# EAGLE board h.z (EAGLE 7.5.0)
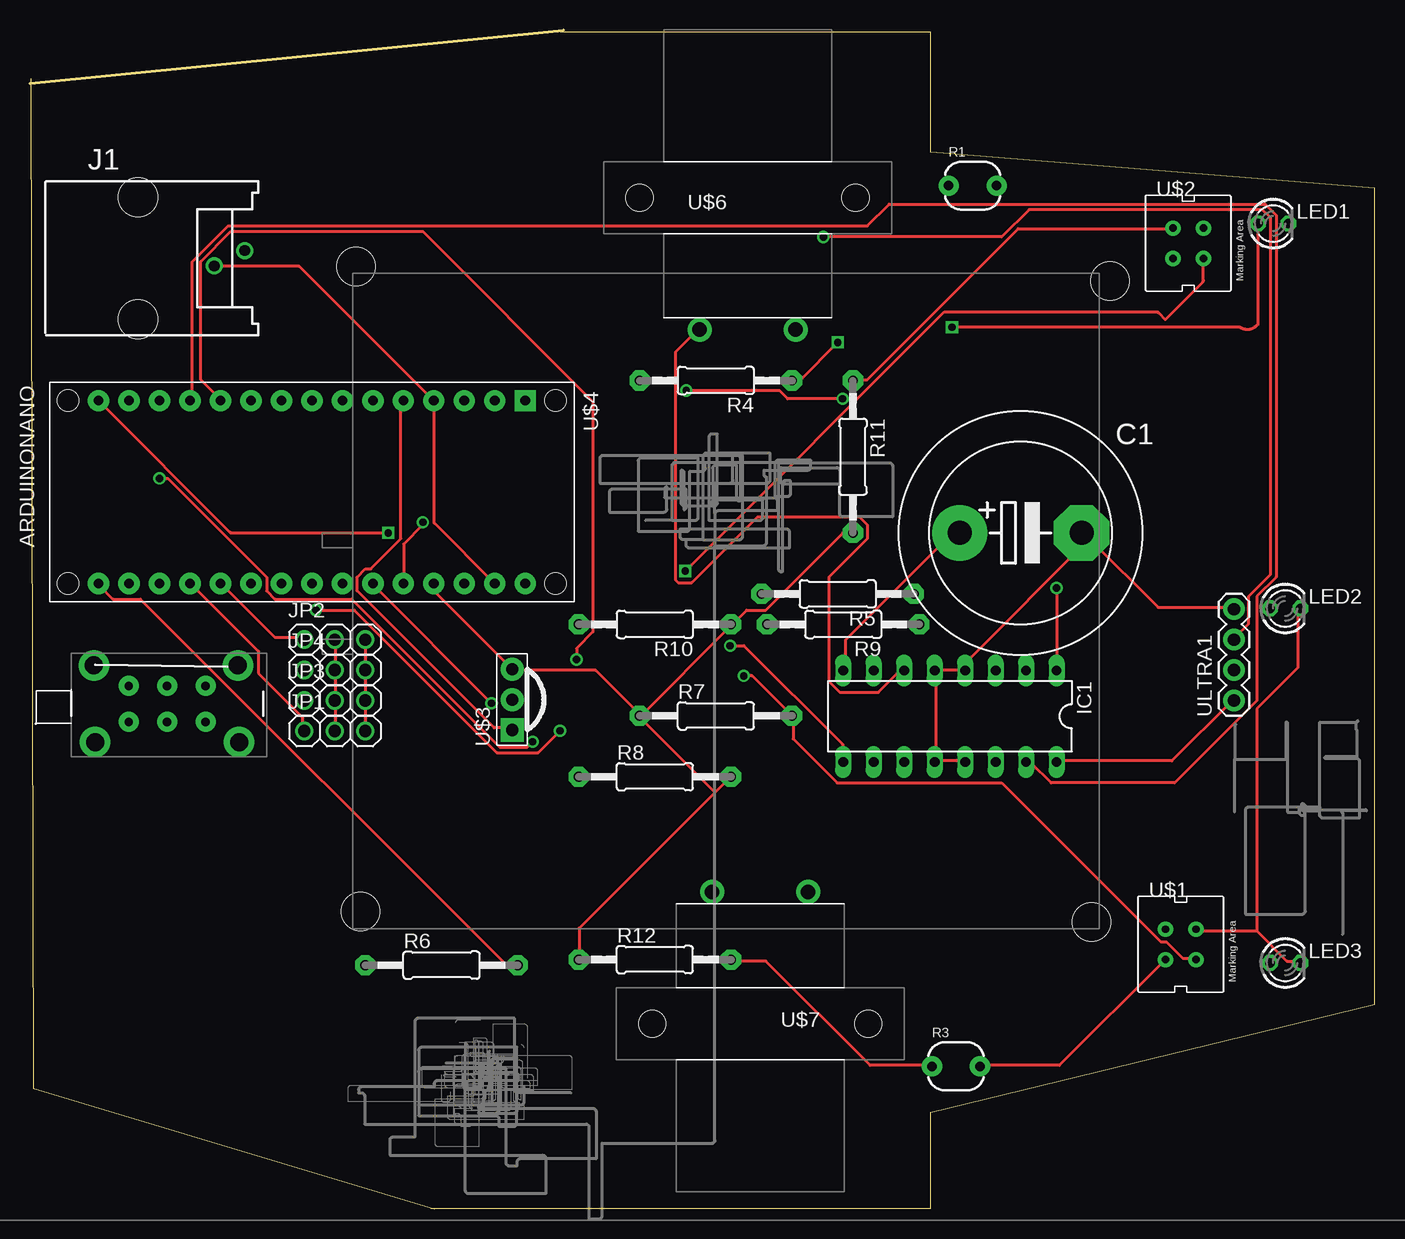
[diagram p0: board, top side]
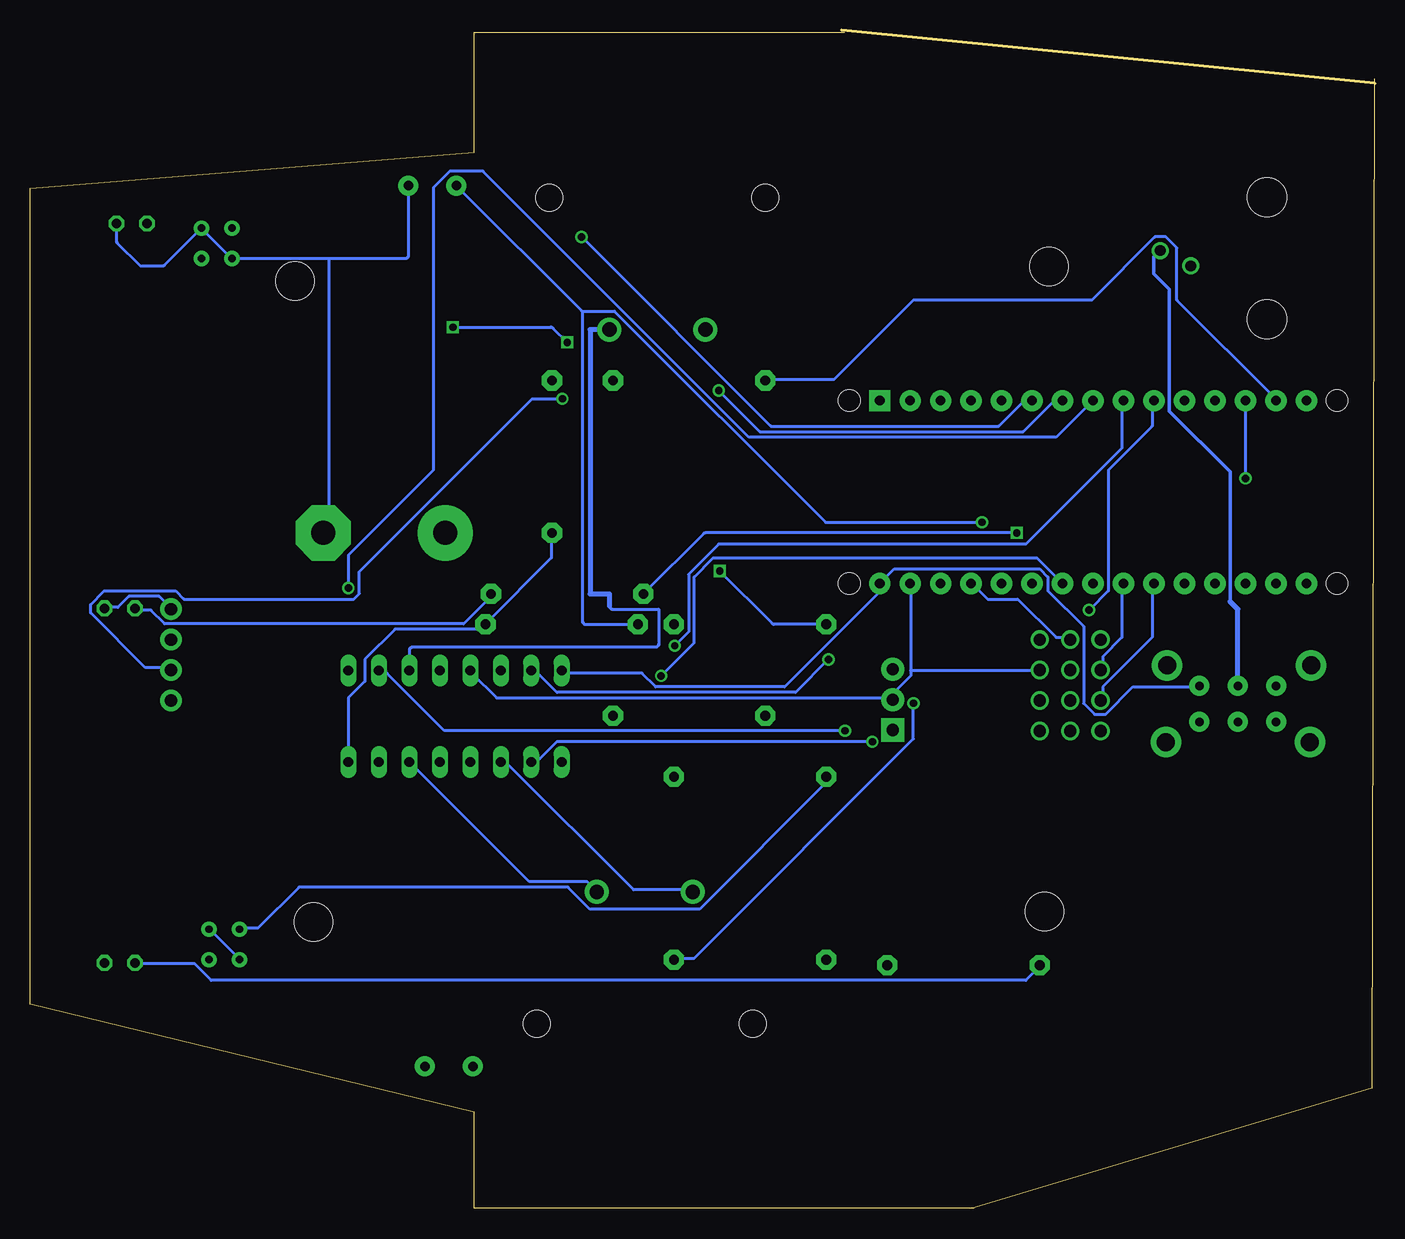
[diagram p1: board, bottom side, seen from below]

Size 112.08 x 98.24 mm. Coordinates in mm from the lower left corner, seen from the top.
Outline: 0.08,94.18 0.28,10.07 33.68,0
Outline: 33.38,0.07 75.08,0.07 75.08,8.07 112.08,17.07 112.08,85.07 75.08,88.07 75.08,98.07 44.17,98.07
Outline: 0,93.79 44.45,98.24
Copper layers (1*16): Top 0.035mm / dielectric 1.5mm / Bottom 0.035mm
Design rules "default": minimum track width 10mil, minimum drill 24mil, track to track 8mil, track to pad 8mil, pad to pad 8mil, via to via 8mil, smd to smd 8mil, copper to edge 40mil, drill to drill 8mil, minimum pad ring 10mil, minimum via ring 8mil, stop-mask expansion 4mil, vias tented up to drill 0mil, thermal gap 10mil
Holes 3.2 mm at 27.54,24.77 27.16,78.53 90,77.31 88.46,23.91

## Footprints (pad centres in the part's own frame; a part is rotated, then mirrored left to right if it is on the bottom)
EB20D = drill 2.007 pad 4.597: + -5.08,0 | drill 2.007 pad 4.597 octagon: - 5.08,0
DIL16 = drill 0.813 long: 1 -8.89,-3.81; 2 -6.35,-3.81; 3 -3.81,-3.81; 4 -1.27,-3.81; 5 1.27,-3.81; 6 3.81,-3.81; 7 6.35,-3.81; 8 8.89,-3.81; 9 8.89,3.81; 10 6.35,3.81; 11 3.81,3.81; 12 1.27,3.81; 13 -1.27,3.81; 14 -3.81,3.81; 15 -6.35,3.81; 16 -8.89,3.81
215876-7 = drill 0.889: 1 -0.635,8.89; 2 0.635,6.35 | hole 3.251: -5.08,0; 5.08,0
1X03 = drill 1.016: 1 -2.54,0; 2 0,0; 3 2.54,0
LED3MM = drill 0.813 octagon: A -1.27,0; K 1.27,0
PHOTOCELL = drill 0.8 pad 1.676: 1 -2,0; 2 2,0
0207/12 = drill 0.813 pad 1.676 octagon: 1 -6.35,0; 2 6.35,0
SWITCHE-DPDT = drill 0.7 pad 1.676: 1 -3.2,1.5; 2 0,1.5; 3 3.2,1.5; 4 -3.2,-1.5; 5 0,-1.5; 6 3.2,-1.5 | drill 1.5 pad 2.54: P$1 -6.1,3.2; P$2 -6,-3.2; P$3 6,-3.2; P$4 5.9,3.2
4 = drill 0.61 pad 1.27: A -1.27,1.27; C 1.27,-1.27; E 1.27,1.27; K -1.27,-1.27
PNA460XM = drill 1.016 pad 1.93 square: 1 -2.54,0 | drill 1.016 pad 1.93: 2 0,0; 3 2.54,0
PDIP-32 = drill 0.8 pad 1.778: 3V3 15.24,-35.56; +5V 15.24,-10.16; A0 15.24,-12.7; A1 15.24,-15.24; A2 15.24,-17.78; A3 15.24,-20.32; A4 15.24,-22.86; A5 15.24,-25.4; A6 15.24,-27.94; A7 15.24,-30.48; AREF 15.24,-33.02; D0/RX 0,-5.08; D2 0,-12.7; D3 0,-15.24; D4 0,-17.78; D5 0,-20.32; D6 0,-22.86; D7 0,-25.4; D8 0,-27.94; D9 0,-30.48; D10 0,-33.02; D11 0,-35.56; D12 0,-38.1; D13 15.24,-38.1; GND 0,-10.16; GND1 15.24,-5.08; RESET 0,-7.62; RESET1 15.24,-7.62; VIN 15.24,-2.54 | drill 0.8 pad 1.778 square: D1/TX 0,-2.54 | hole 1.778: 0,0; 0,-40.64; 15.24,-40.64; 15.24,0
VIBE-MOTOR-10MM = drill 1.2 pad 2: + 13,-11; - 5,-11 | hole 2.25: 0,0; 18,0
1X04-BIG = drill 1.016 pad 1.778: 1 0,0; 2 2.54,0; 3 5.08,0; 4 7.62,0

## Placement (x,y rotation side)
C1  [EB20D]  82.55,56.33 0 top
IC1  L293D  [DIL16]  76.66,41.05 180 top
J1  [215876-7]  9,79.22 270 top
JP1  [1X03]  25.4,39.82 0 top
JP2  [1X03]  25.4,47.44 0 top
JP3  [1X03]  25.4,42.36 0 top
JP4  [1X03]  25.4,44.9 0 top
LED1  TLLG4400  [LED3MM]  103.6,82.12 0 top
LED2  TLLR4400  [LED3MM]  104.6,50.04 0 top
LED3  TLLY4400  [LED3MM]  104.6,20.5 0 top
R1  PHOTOCELLPTH  [PHOTOCELL]  78.55,85.27 0 top
R3  PHOTOCELLPTH  [PHOTOCELL]  77.17,11.88 0 top
R4  1k  [0207/12]  57.15,69.03 180 top
R5  1k  [0207/12]  67.31,51.25 180 top
R6  1k  [0207/12]  34.29,20.31 0 top
R7  1k  [0207/12]  57.15,41.09 0 top
R8  100  [0207/12]  52.07,36.01 0 top
R9  10k  [0207/12]  67.77,48.71 180 top
R10  1k  [0207/12]  52.07,48.71 180 top
R11  100  [0207/12]  68.58,62.68 270 top
R12  10k  [0207/12]  52.07,20.77 0 top
S1  [SWITCHE-DPDT]  11.43,42.09 0 top
U$1  CNY70  [4]  95.9,22.04 0 top
U$2  CNY70  [4]  96.52,80.46 0 top
U$3  PNA460XM  [PNA460XM]  40.18,42.44 90 top
U$4  ARDUINONANO  [PDIP-32]  43.81,67.35 270 top
U$5  LIPO-OUTLINE2000  [LIPO-2000]  26.88,23.34 0 top
U$6  MOTOR10MM  [VIBE-MOTOR-10MM]  50.8,84.27 0 top
U$7  MOTOR10MM  [VIBE-MOTOR-10MM]  69.85,15.42 180 top
ULTRA1  1X4-BIG  [1X04-BIG]  100.33,42.36 90 top

## Library data of the parts
C1 JP1-JP4 R4-R12 U$3 ULTRA1 = adafruit
IC1 = st-microelectronics; MPN: L293D; OC_FARNELL: 9589619; OC_NEWARK: 56P8249
J1 = con-amp
LED1 = led; MF: VISHAY SEMICONDUCTOR; OC_FARNELL: 1612435
LED2 = led; MF: VISHAY SEMICONDUCTOR; OC_FARNELL: 1612437
LED3 = led; MF: VISHAY SEMICONDUCTOR; OC_FARNELL: 1612439
R1 R3 = SparkFun-Sensors
S1 U$5-U$7 = SparkFun-Electromechanical
U$1 U$2 = cny70
U$4 = jet-lib

## Nets
GND: C1.- IC1.4 IC1.5 IC1.12 IC1.13 J1.2 JP1.3 JP2.3 JP3.3 JP4.3 LED1.K LED2.K LED3.K R1.2 R3.2 U$1.E U$1.K U$2.E U$2.K U$3.2 U$4.GND U$4.GND1 ULTRA1.4
N$1: LED1.A R4.1
N$2: LED2.A R5.1
N$3: LED3.A R6.1
N$4: IC1.2 U$4.D7
N$5: IC1.7 U$4.D8
N$6: IC1.15 U$4.D9
N$7: IC1.10 U$4.D10
N$8: IC1.1 U$4.D5
N$9: IC1.9 U$4.D6
N$10: IC1.3 U$6.+
N$11: IC1.6 U$6.-
N$12: IC1.14 U$7.-
N$13: IC1.11 U$7.+
N$14: R4.2 U$4.D11
N$15: R5.2 U$4.D12
N$16: R6.2 U$4.D13
N$17: U$4.A3
N$18: R7.2 U$1.C U$4.A2
N$19: R11.1 U$2.A
N$20: U$3.1 U$4.D2
N$21: J1.1 S1.2
N$22: R8.1 U$1.A
N$23: JP1.1 U$4.A7
N$24: R1.1 R9.2 U$4.A0
N$25: R3.1 R12.2 U$4.A1
N$26: R10.2 U$2.C
N$27: U$4.D4 ULTRA1.2
N$28: U$4.D3 ULTRA1.3
N$29: JP2.1 U$4.A6
N$30: JP3.1 U$4.A5
N$31: JP4.1 U$4.A4
V+: C1.+ IC1.8 S1.3 U$4.VIN
VCC: IC1.16 JP1.2 JP2.2 JP3.2 JP4.2 R7.1 R8.2 R9.1 R10.1 R11.2 R12.1 U$3.3 U$4.+5V ULTRA1.1

## Tracks (layer width: path | path; a pad name or v marks a point on that pad's centre or on a via)
GND
  Top 0.254: J1.2 22.31,78.58 arc-45 22.49,78.51 U$4.GND 33.65,57.29 arc45 33.72,57.12 U$4.GND1 | 102.23,23.16 104.75,20.64 105.66,20.64 LED3.K | 102.23,23.16 97.21,23.16 U$1.E | R3.2 79.38,11.96 85.78,11.96 94.46,20.64 U$1.K | JP1.3 JP3.3 JP4.3 JP2.3 | 75.49,37.33 77.77,37.33 IC1.13 | 75.49,37.33 75.49,44.65 IC1.5 75.49,44.87 77.77,44.87 IC1.4 78,44.87 78,45.56 88.29,55.85 | 75.49,37.33 IC1.12 | 88.29,55.85 87.83,56.3 C1.- 88.29,55.85 | 88.29,55.85 94,50.13 100.18,50.13 ULTRA1.4 | 102.23,23.16 102.23,41.67 105.66,45.1 105.66,49.9 LED2.K
  Bottom 0.254: R1.2 80.55,79.44 arc90 80.8,79.19 87.15,79.19 | 87.15,79.19 U$2.K U$2.E 100.89,78.63 arc45 101.07,78.55 102.87,78.55 104.8,80.48 arc45 104.87,80.66 LED1.K | U$1.K 94.69,20.87 96.98,23.16 U$1.E | 38.68,44.87 38.68,51.96 U$4.GND1 | 38.68,44.87 38.68,44.42 40.06,43.05 40.06,42.59 U$3.2 40.28,42.59 73.2,42.59 75.26,44.65 IC1.5 | 38.68,44.87 27.94,44.87 JP4.3 | LED2.K 105.66,50.13 104.75,50.13 103.83,51.05 101.32,51.05 100.41,50.13 ULTRA1.4 | 87.15,79.19 87.15,56.99 87.61,56.53 C1.-
N$1  (via drill 0.6)
  Top 0.254: LED1.A 102.33,73.73 arc-90 100.81,73.47 v76.83,73.47 | v67.31,72.2 64.14,69.03 R4.1
  Bottom 0.254: v76.83,73.47 68.69,73.47 arc45 68.51,73.4 v67.31,72.2
N$2
  Bottom 0.254: LED2.A 103.15,49.9 102.01,49.9 100.86,48.76 75.95,48.76 73.66,51.05 R5.1
N$3
  Bottom 0.254: LED3.A 103.15,20.41 98.35,20.41 96.98,19.04 29.08,19.04 27.94,20.19 R6.1
N$4  (via drill 0.61)
  Top 0.254: v44.17,39.84 42.34,38.02 38.91,38.02 27.03,49.9 v23.83,49.9
  Bottom 0.254: v44.17,39.84 77.55,39.84 82.35,44.65 82.8,44.65 IC1.2 | v23.83,49.9 22.23,51.5 22.23,61.56 18.57,65.22 18.57,67.28 U$4.D7
N$5  (via drill 0.61)
  Top 0.254: v45.54,45.79 45.54,46.7 46.91,48.07 46.91,67.28 32.74,81.45 16.74,81.45 14.22,78.94 14.22,69.11 15.82,67.51 U$4.D8
  Bottom 0.254: v45.54,45.79 48.28,43.05 68.17,43.05 69.77,44.65 70.23,44.65 IC1.7
N$6
  Top 0.254: IC1.15 83.03,37.1 83.49,37.1 85.09,35.5 95.38,35.5 102.23,42.36 102.23,51.05 103.83,52.65 103.83,82.82 102.92,83.74 71.6,83.74 69.77,81.91 16.51,81.91 13.54,78.94 13.54,67.51 U$4.D9
N$7  (via drill 0.61)
  Top 0.254: v41.88,38.93 41.43,38.47 39.14,38.47 26.8,50.82 20.4,50.82 19.71,51.5 19.71,52.65 11.48,60.88 v10.79,60.88
  Bottom 0.254: v41.88,38.93 68.17,38.93 69.77,37.33 70.23,37.33 IC1.10 | v10.79,60.88 10.79,67.28 U$4.D10
N$8  (via drill 0.61)
  Top 0.254: v85.55,51.73 85.55,44.87 IC1.1
  Bottom 0.254: v85.55,51.73 85.55,54.48 78.46,61.56 78.46,85.11 77.09,86.48 74.35,86.48 52.17,64.31 26.57,64.31 23.6,67.28 U$4.D5
N$9  (via drill 0.61)
  Top 0.254: v58.34,46.93 59.49,46.93 67.72,38.7 67.72,37.33 IC1.9
  Bottom 0.254: v58.34,46.93 57.2,48.07 57.2,52.88 54.69,55.39 29.08,55.39 21.08,63.39 21.08,67.28 U$4.D6
N$10
  Bottom 0.254: 63.8,50.23 arc-90 63.55,49.98 59.69,49.98 59.69,47.06 arc90 59.94,46.8 80.22,46.8 arc-90 80.47,46.55 IC1.3
  Bottom 0.406: U$6.+ 65.41,73.27 65.41,51.25 63.8,51.25 63.8,50.23
N$11
  Top 0.254: IC1.6 72.75,44.65 72.29,44.65 70.69,43.05 67.49,43.05 66.57,43.96 66.57,52.65 69.77,55.85 69.77,56.99 69.09,57.68 60.63,57.68 55.14,52.19 54,52.19 53.77,52.42 53.77,71.39 55.6,73.22 U$6.-
N$12
  Bottom 0.254: IC1.14 80.29,37.1 70.46,27.27 65.66,27.27 64.97,26.59 U$7.-
N$13
  Bottom 0.254: IC1.11 72.75,37.1 72.29,37.1 61.77,26.59 56.97,26.59 U$7.+
N$14
  Bottom 0.254: R4.2 50.8,69.11 45.09,69.11 38.46,75.74 23.6,75.74 18.34,80.99 17.42,80.99 16.51,80.08 16.51,75.74 8.28,67.51 U$4.D11
N$15  (via drill 0.6)
  Top 0.254: U$4.D12 16.66,56.4 arc45 16.84,56.33 v29.84,56.33
  Bottom 0.254: v29.84,56.33 55.77,56.33 arc-45 55.95,56.26 R5.2
N$16
  Top 0.254: R6.2 40.51,20.41 39.6,20.41 9.2,50.82 6.91,50.82 5.77,51.96 U$4.D13
N$18  (via drill 0.61)
  Top 0.254: U$1.C 96.98,20.87 96.06,20.87 94.69,22.24 94.23,22.24 80.97,35.5 67.26,35.5 63.6,39.16 63.6,40.99 R7.2 60.17,44.42 v59.49,44.42
  Bottom 0.254: v59.49,44.42 56.74,47.16 56.74,52.65 55.14,54.25 28.17,54.25 26.11,52.19 U$4.A2
N$19
  Top 0.254: U$2.A 95.15,81.68 82.35,81.68 69.77,69.11 68.63,69.11 R11.1
N$20
  Top 0.254: U$4.D2 30.91,67.28 30.91,55.85 28.4,53.33 27.94,53.33 27.25,52.65 27.25,51.5 38.68,40.07 40.06,40.07 U$3.1
N$21
  Bottom 0.305: 12.07,50.61 12.07,61.41 17.14,66.49 17.14,76.65 18.41,77.92 18.41,79.33 J1.1
  Bottom 0.406: S1.2 11.43,49.98 12.07,50.61
N$22
  Bottom 0.254: U$1.A 94.46,23.39 93.09,23.39 89.66,26.81 67.26,26.81 65.43,24.99 56.29,24.99 45.77,35.5 45.77,35.96 R8.1
N$23
  Top 0.254: JP1.1 22.68,39.84 22.68,40.99 19.02,44.65 19.02,46.47 13.54,51.96 U$4.A7
N$24  (via drill 0.61)
  Top 0.254: v32.74,57.22 32.74,56.99 31.14,55.39 31.14,52.19 U$4.A0
  Bottom 0.254: R1.1 66.11,74.83 | 66.11,74.83 arc45 66.04,74.65 66.04,48.96 arc-90 65.79,48.71 R9.2 | v32.74,57.22 45.77,57.22 63.37,74.82 66.12,74.82 66.11,74.83
N$25  (via drill 0.61)
  Top 0.254: R12.2 58.57,20.64 61.32,20.64 70,11.96 75.03,11.96 R3.1 | v38.46,42.13 28.63,51.96 U$4.A1
  Bottom 0.254: v38.46,42.13 38.46,39.16 56.74,20.87 58.34,20.87 R12.2
N$26  (via drill 0.6)
  Top 0.254: v54.61,53.15 76.2,74.74 93.88,74.74 arc-45 94.05,74.67 94.61,74.11 97.72,77.21 arc45 97.79,77.39 U$2.C
  Bottom 0.254: R10.2 50.06,48.71 arc45 50.24,48.78 v54.61,53.15
N$27  (via drill 0.61)
  Top 0.254: v54.69,68.19 62.46,68.19 63.14,67.51 v67.72,67.51
  Bottom 0.254: v54.69,68.19 51.26,64.76 29.31,64.76 26.8,67.28 26.11,67.28 U$4.D4 | v67.72,67.51 70.23,67.51 84.63,53.1 84.63,51.27 85.09,50.82 99.26,50.82 99.95,51.5 105.89,51.5 107.04,50.36 107.04,49.67 102.46,45.1 100.41,45.1 ULTRA1.2
N$28  (via drill 0.61)
  Top 0.254: v66.12,80.99 80.97,80.99 83.26,83.28 102.69,83.28 103.38,82.59 103.38,52.88 101.55,51.05 101.55,48.76 100.41,47.62 ULTRA1.3
  Bottom 0.254: v66.12,80.99 50.34,65.22 31.37,65.22 29.31,67.28 28.63,67.28 U$4.D3
N$29
  Top 0.254: JP2.1 22.68,47.62 20.4,47.62 16.05,51.96 U$4.A6
N$30
  Bottom 0.254: JP3.1 22.68,42.36 22.68,43.5 18.57,47.62 18.57,51.96 U$4.A5
N$31
  Bottom 0.254: JP4.1 22.68,45.1 22.68,46.02 21.08,47.62 21.08,51.96 U$4.A4
V+
  Top 0.254: IC1.8 67.95,44.87 67.95,47.39 76.86,56.3 77.32,56.3 C1.+
  Bottom 0.254: S1.3 14.68,43.5 20.17,43.5 22.45,41.22 23.37,41.22 24.28,42.13 24.28,48.53 27.25,51.5 27.25,52.65 27.94,53.33 40.06,53.33 41.2,52.19 U$4.VIN 41.43,51.96 41.43,51.27 49.2,43.5 59.94,43.5 61.09,44.65 67.72,44.65 IC1.8
VCC
  Top 0.254: 25.42,42.36 25.42,39.84 JP1.2 | JP2.2 25.42,47.39 25.42,45.1 JP4.2 25.42,44.87 25.42,42.36 | 25.42,42.36 JP3.2 | U$4.+5V 33.66,51.96 33.66,51.5 40.06,45.1 U$3.3 40.28,44.87 47.14,44.87 50.8,41.22 R7.1 50.8,40.99 | IC1.16 85.78,37.33 95.15,37.33 100.18,42.36 ULTRA1.1 | 57.2,34.82 58.34,35.96 R8.2 | 57.2,34.82 45.77,23.39 45.77,20.87 R12.1 | 50.8,40.99 56.97,34.82 57.2,34.82 | 50.8,40.99 58.34,48.53 R10.1 58.57,48.76 59.71,49.9 61.32,49.9 67.72,56.3 68.4,56.3 R11.2
  Bottom 0.254: JP2.2 25.42,47.62 26.57,47.62 29.77,50.82 32.28,50.82 33.43,51.96 U$4.+5V | R11.2 68.63,56.3 68.63,54.25 74.12,48.76 R9.1 74.35,48.53 74.57,48.3 81.66,48.3 84.18,45.79 84.18,43.96 85.55,42.59 85.55,37.33 IC1.16